# Altium PCB Luna_Board_PCB_D0.PcbDoc (part 1 of 2)
Units mm, origin at the board's own origin, x right, y up, seen from the top; angles counter-clockwise.
Board outline 53.97 x 25.4 mm, 4 copper layers (Top Layer, Layer 1, Layer 2, Bottom Layer), stack 1.587 mm thick; 65 components, 71 nets, 287 pads, 168 vias.
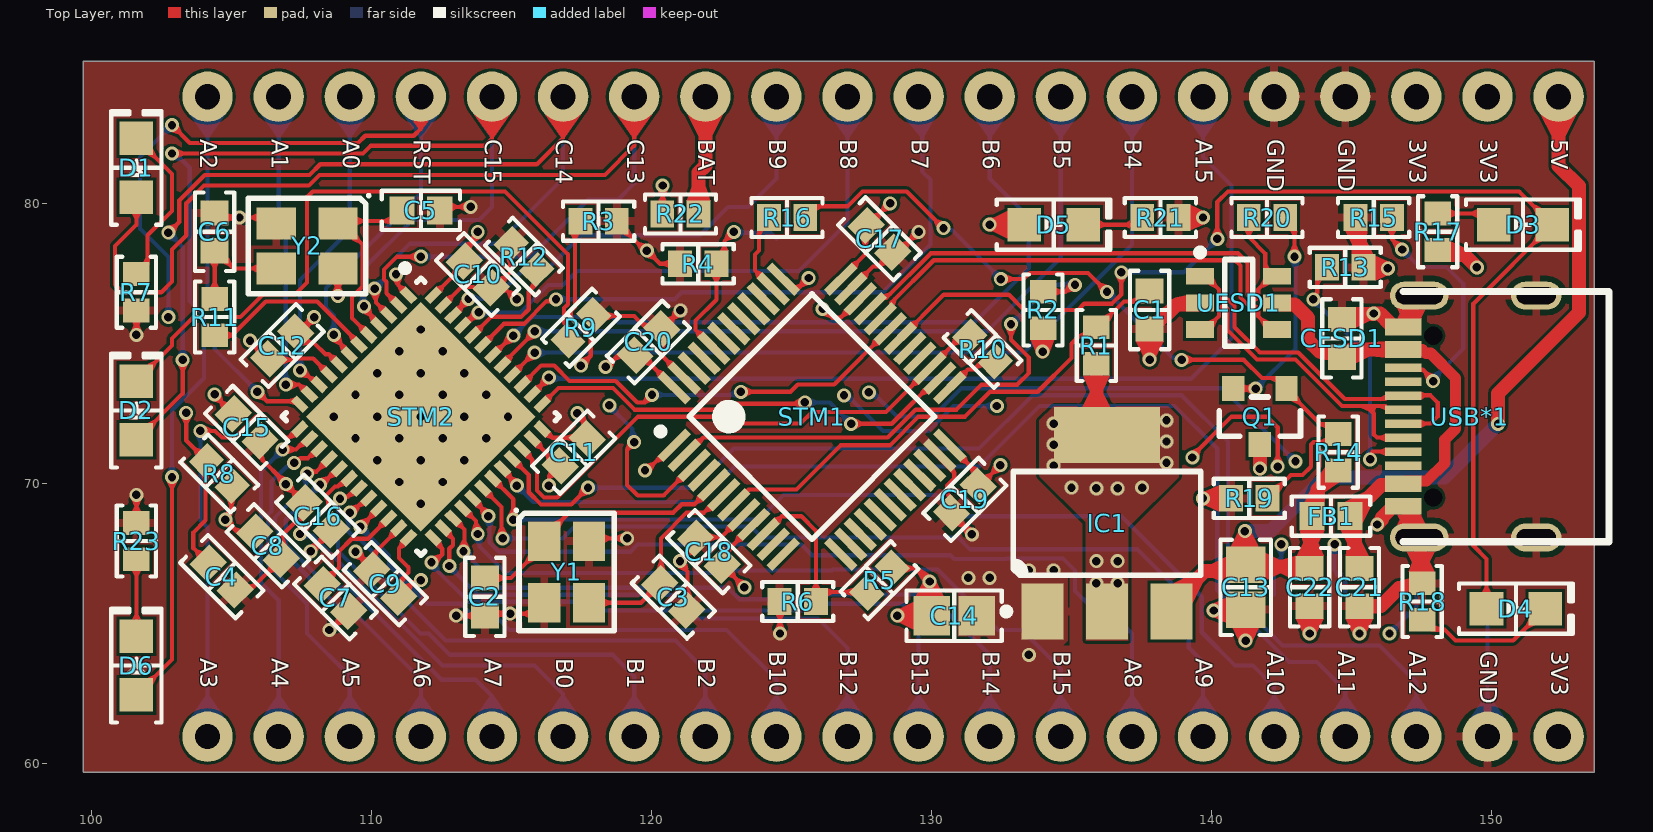
[diagram p0: Top Layer view]
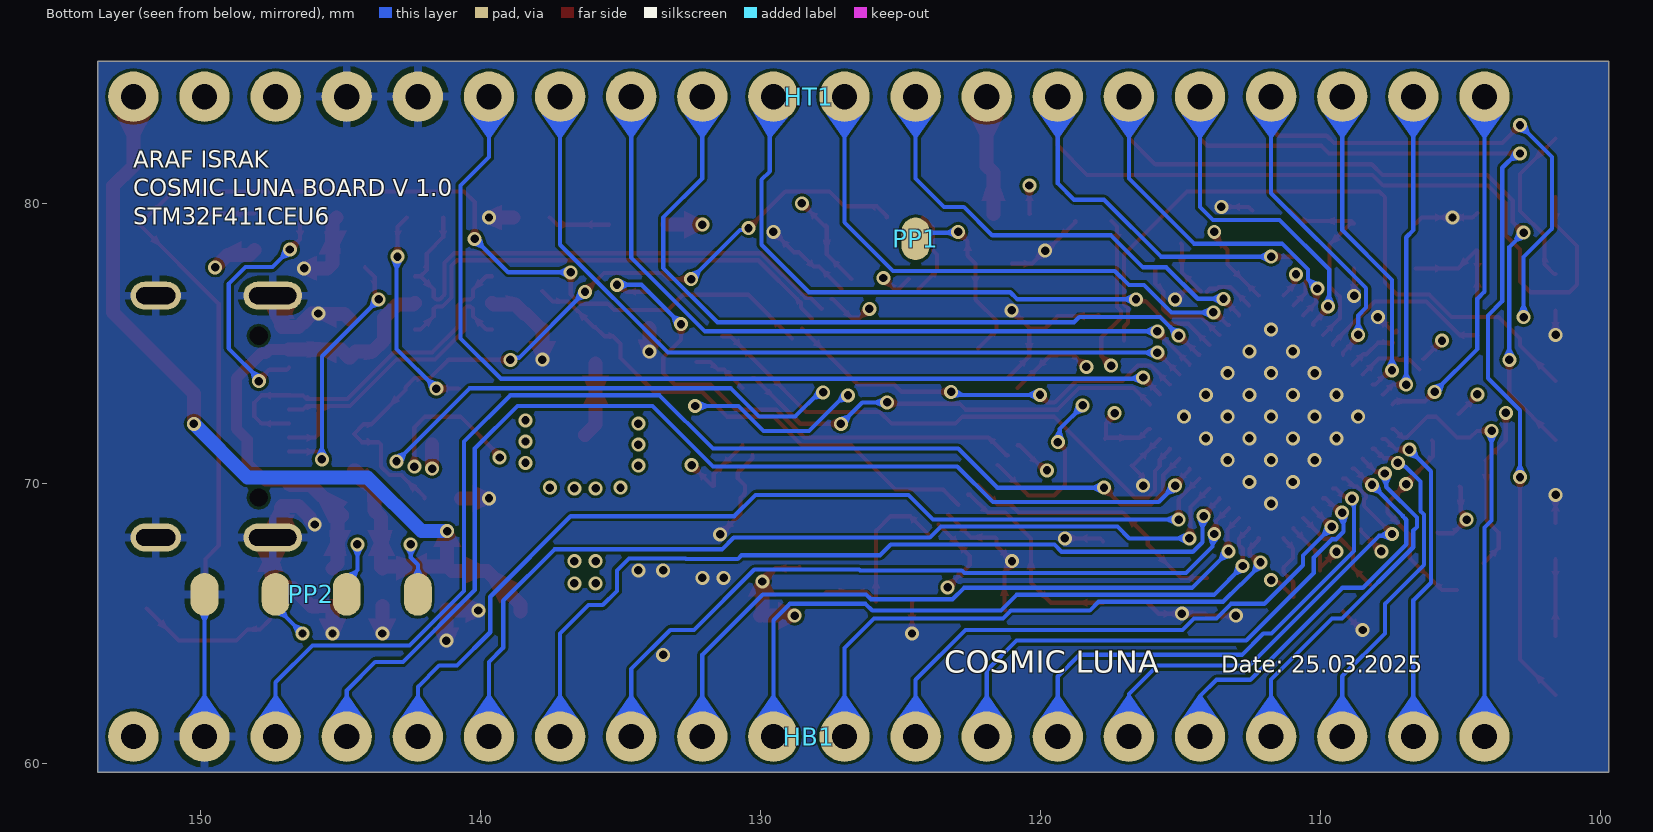
[diagram p1: Bottom Layer view, seen from below]
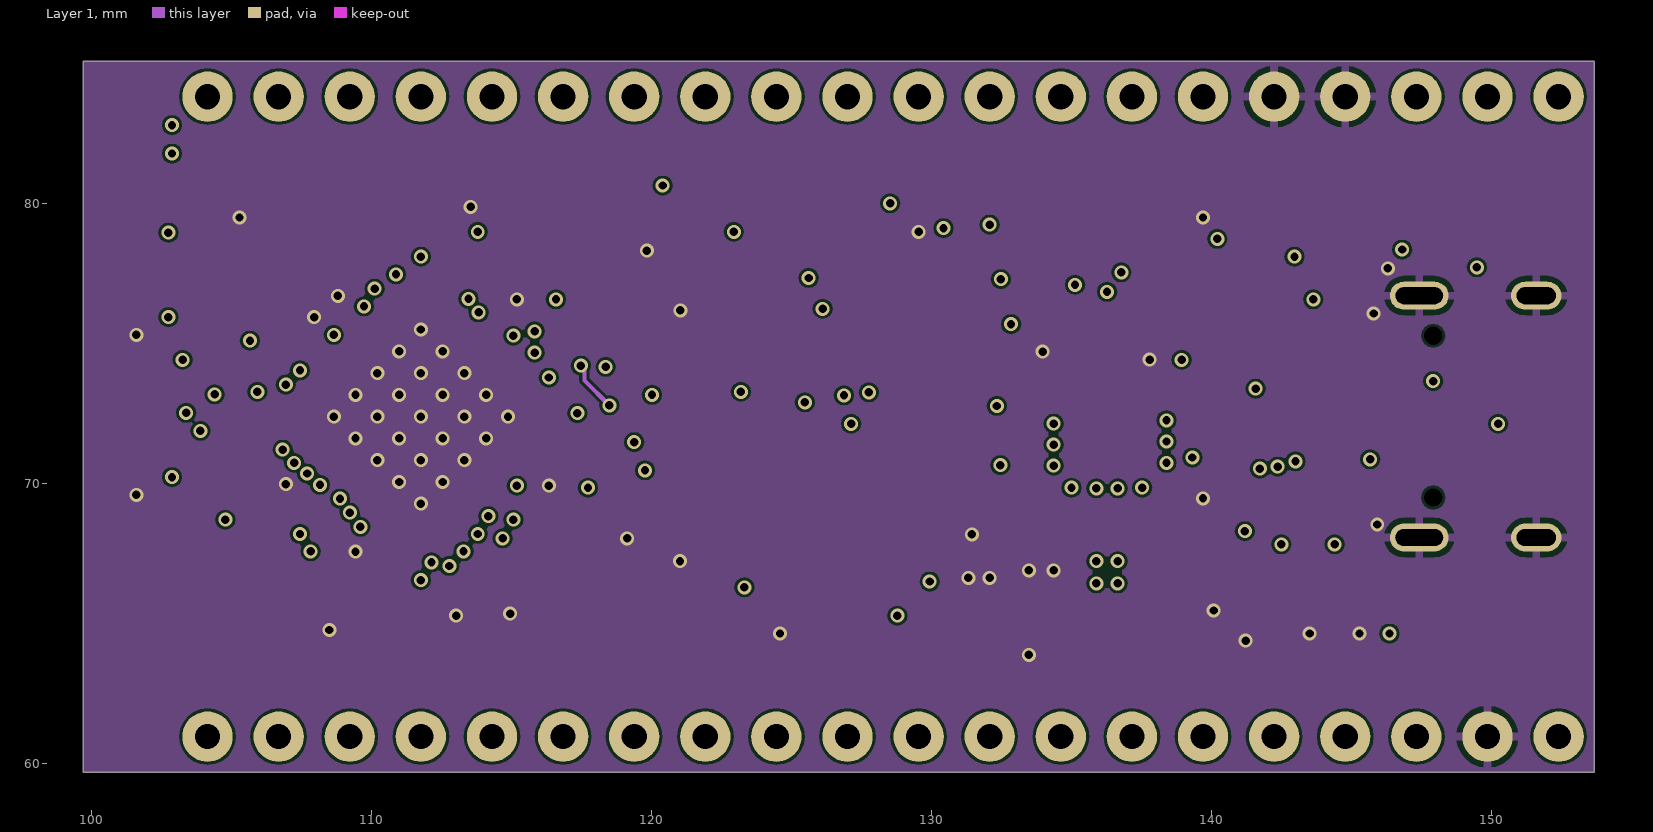
[diagram p2: Layer 1]
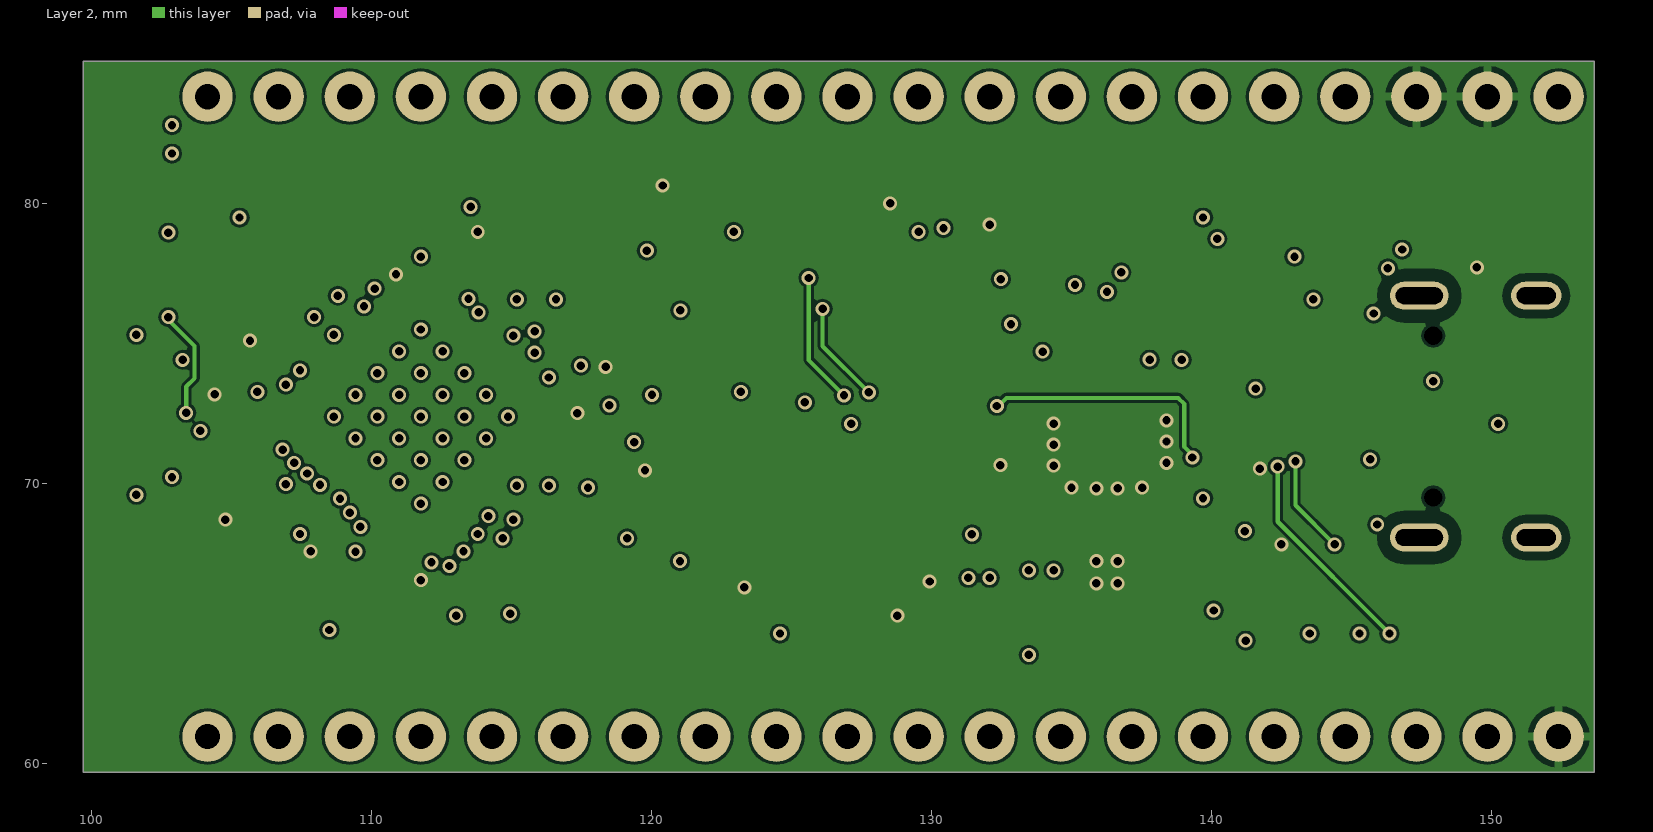
[diagram p3: Layer 2]
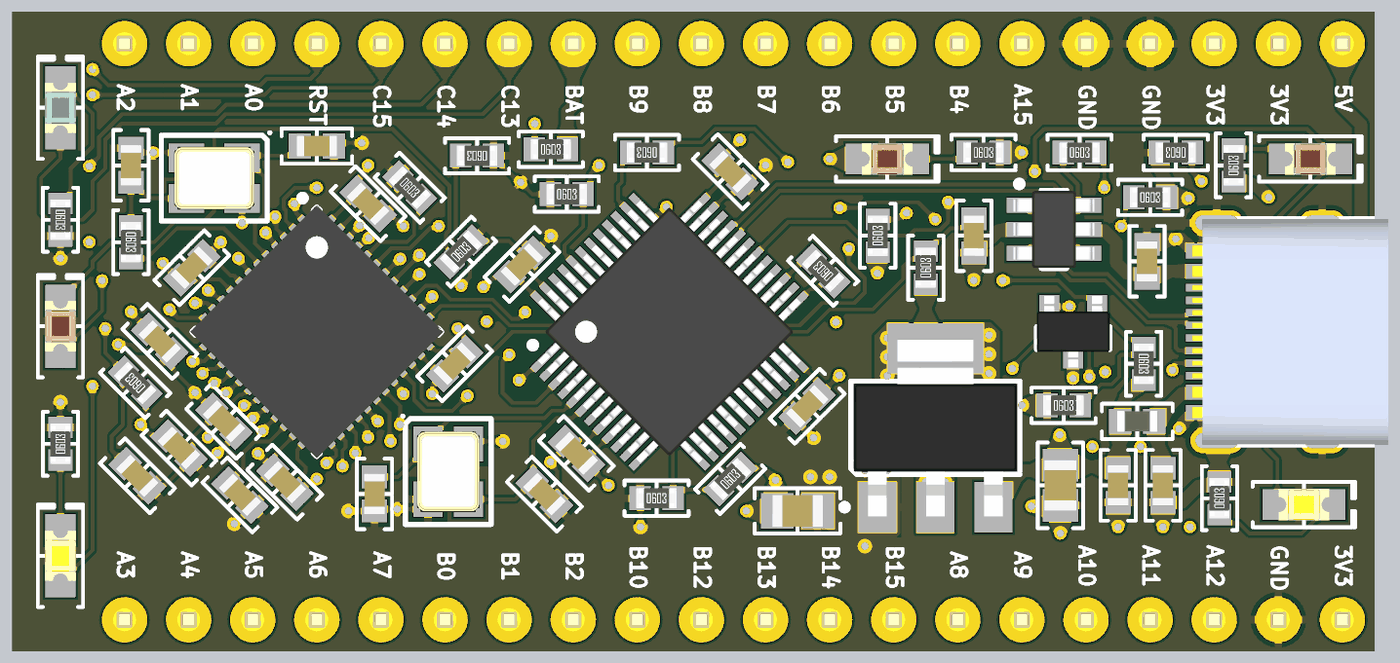
[diagram p5: 3D render of the assembled board from above, using the file's embedded part models]

## Layer stack, top to bottom
Top Solder: solder mask 0.0102, Solder Resist, Dk 3.5
Top Layer: signal copper 0.0356
Dielectric 2: prepreg 0.21, PP-006, Dk 4.1
Layer 1: signal copper 0.0153
Dielectric 1: dielectric 1.065, FR-4, Dk 4.8
Layer 2: signal copper 0.0153
Dielectric 3: prepreg 0.21, PP-006, Dk 4.1
Bottom Layer: signal copper 0.0356
Bottom Solder: solder mask 0.0102, Solder Resist, Dk 3.5

## Board outline
99.695,59.69 99.695,85.09 153.67,85.09 153.67,59.69

## Design rules (kind name [scope] priority, off if disabled: settings)
Clearance [All] p1: gap=0.1 ignorepadtopadclearanceinfootprint=TRUE
DiffPairsRouting [All] p1: maxlimit=0.254 minlimit=0.1 mostfreqgap=0.15 toplayer_minwidth=0.1 toplayer_maxwidth=0.381 toplayer_prefwidth=0.15 midlayer1_minwidth=0.1 midlayer1_maxwidth=0.381 midlayer1_prefwidth=0.15 midlayer2_minwidth=0.1 midlayer2_maxwidth=0.381 midlayer2_prefwidth=0.15 bottomlayer_minwidth=0.1 bottomlayer_maxwidth=0.381 bottomlayer_prefwidth=0.15 maxuncoupledlength=12.7
HoleSize [All] p1: absolutevalues=TRUE maxlimit=2.54 minlimit=0.15 maxpercent=80.000 minpercent=20.000
HoleToHoleClearance [All] p1: gap=0.2 allowstackedmicrovias=TRUE
MinimumSolderMaskSliver [All] p1: minsoldermaskwidth=0.01
PolygonConnect PolygonConnect_7 [All vs IsNamedPolygon('GND_L04_P012')] p1: thpad.connectstyle=Relief thpad.reliefconductorwidth=0.3 thpad.reliefentries=4 thpad.polygonreliefangle="90 Angle" thpad.airgapwidth=0.2 smdpad.connectstyle=Relief smdpad.reliefconductorwidth=0.3 smdpad.reliefentries=4 smdpad.polygonreliefangle="90 Angle" smdpad.airgapwidth=0.2 via.connectstyle=Direct via.reliefconductorwidth=0.254 via.reliefentries=4 via.polygonreliefangle="90 Angle" via.airgapwidth=0.254
PolygonConnect PolygonConnect_6 [All vs IsNamedPolygon('GND_L01_P010')] p2: thpad.connectstyle=Relief thpad.reliefconductorwidth=0.3 thpad.reliefentries=4 thpad.polygonreliefangle="90 Angle" thpad.airgapwidth=0.2 smdpad.connectstyle=Relief smdpad.reliefconductorwidth=0.3 smdpad.reliefentries=4 smdpad.polygonreliefangle="90 Angle" smdpad.airgapwidth=0.2 via.connectstyle=Direct via.reliefconductorwidth=0.254 via.reliefentries=4 via.polygonreliefangle="90 Angle" via.airgapwidth=0.254
PolygonConnect PolygonConnect_5 [All vs IsNamedPolygon('GND_L02_P000')] p3: thpad.connectstyle=Relief thpad.reliefconductorwidth=0.3 thpad.reliefentries=4 thpad.polygonreliefangle="90 Angle" thpad.airgapwidth=0.2 smdpad.connectstyle=Relief smdpad.reliefconductorwidth=0.3 smdpad.reliefentries=4 smdpad.polygonreliefangle="90 Angle" smdpad.airgapwidth=0.2 via.connectstyle=Direct via.reliefconductorwidth=0.254 via.reliefentries=4 via.polygonreliefangle="90 Angle" via.airgapwidth=0.254
PolygonConnect PolygonConnect_4 [All vs IsNamedPolygon('+3V3_L03_P002')] p4: thpad.connectstyle=Relief thpad.reliefconductorwidth=0.3 thpad.reliefentries=4 thpad.polygonreliefangle="90 Angle" thpad.airgapwidth=0.2 smdpad.connectstyle=Relief smdpad.reliefconductorwidth=0.3 smdpad.reliefentries=4 smdpad.polygonreliefangle="90 Angle" smdpad.airgapwidth=0.2 via.connectstyle=Direct via.reliefconductorwidth=0.254 via.reliefentries=4 via.polygonreliefangle="90 Angle" via.airgapwidth=0.254
PolygonConnect PolygonConnect_3 [All vs IsNamedPolygon('+3V3_L01_P008')] p5: connectstyle=Direct reliefconductorwidth=0.254 reliefentries=4 polygonreliefangle="90 Angle" airgapwidth=0.254
PolygonConnect PolygonConnect_2 [All vs IsNamedPolygon('GND_L01_P004')] p6: connectstyle=Direct reliefconductorwidth=0.254 reliefentries=4 polygonreliefangle="90 Angle" airgapwidth=0.254
PolygonConnect PolygonConnect_1 [All vs IsNamedPolygon('GND_L01_P004')] p7: thpad.connectstyle=Direct thpad.reliefconductorwidth=0.254 thpad.reliefentries=4 thpad.polygonreliefangle="90 Angle" thpad.airgapwidth=0.254 smdpad.connectstyle=Direct smdpad.reliefconductorwidth=0.254 smdpad.reliefentries=4 smdpad.polygonreliefangle="90 Angle" smdpad.airgapwidth=0.254 via.connectstyle=Relief via.reliefconductorwidth=0.254 via.reliefentries=4 via.polygonreliefangle="90 Angle" via.airgapwidth=0.254
PolygonConnect [All] p8: connectstyle=Relief reliefconductorwidth=0.3 reliefentries=4 polygonreliefangle="90 Angle" airgapwidth=0.2
RoutingVias [All] p1: holewidth=0.3 width=0.5 viastyle="Through Hole" minholewidth=0.3 minwidth=0.5 maxholewidth=0.3 maxwidth=0.5
SilkToSilkClearance [All] p1: silktosilkclearance=0
SilkToSolderMaskClearance [IsPad] p1: minsilkscreentomaskgap=0.01 clearancetoexposedcopper=TRUE
SolderMaskExpansion [All] p1: expansion=0.038
UnRoutedNet [All] p1: checkbadconnections=TRUE
Width [All] p1: maxlimit=0.5 minlimit=0.1 preferedwidth=0.15
23 further rules are at their usual default settings.

## Classes and differential pairs
differential pair USB: +USB_P -USB_N
differential pair DF: +DF_P -DF_N

## Components (designator, comment, footprint, x,y, rotation, side; value= is the part's Value field where it differs from the comment)
C1 "100nF" "CAP 0603_1608" 137.795,76.2 r90 top
C2 "12 pF" "CAP 0603_1608" 114.046,65.953 r90 top
C3 "12 pF" "CAP 0603_1608" 120.777,65.944 r135 top
C4 "100nF" "CAP 0603_1608" 104.648,66.675 r135 top
C5 "12 pF" "CAP 0603_1608" 111.76,79.756 r180 top
C6 "12 pF" "CAP 0603_1608" 104.394,78.994 r270 top
C7 "4.7µF" "CAP 0603_1608" 108.712,65.913 r315 top
C8 "10µF" "CAP 0603_1608" 106.299,67.778 r135 top
C9 "100nF" "CAP 0603_1608" 110.49,66.421 r315 top
C10 "100nF" "CAP 0603_1608" 113.792,77.47 r135 top
C11 "100nF" "CAP 0603_1608" 117.221,71.12 r45 top
C12 "100nF" "CAP 0603_1608" 106.807,74.93 r225 top
C13 "22µF" "CAP 0805_2012" 141.224,66.294 r90 top
C14 "22µF" "CAP 0805_2012" 130.81,65.278 r180 top
C15 "1 µF" "CAP 0603_1608" 105.537,72.009 r135 top
C16 "100nF" "CAP 0603_1608" 108.077,68.834 r315 top
C17 "100nF" "CAP 0603_1608" 128.143,78.74 r135 top
C18 "100nF" "CAP 0603_1608" 122.047,67.564 r315 top
C19 "100nF" "CAP 0603_1608" 131.191,69.436 r45 top
C20 "100nF" "CAP 0603_1608" 119.888,75.057 r225 top
C21 "2.2µF" "CAP 0603_1608" 145.288,66.294 r270 top
C22 "2.2µF" "CAP 0603_1608" 143.51,66.294 r270 top
CESD1 "100nF" "CAP 0603_1608" 144.659,75.184 r270 top
D1 "Green" "LED 0805_2012 GREEN" 101.6,81.28 r90 top
D2 "Red" "LED 0805_2012 RED" 101.6,72.61 r90 top
D3 "Red" "LED 0805_2012 RED" 151.13,79.248 r0 top
D4 "Yellow" "LED 0805_2012 YELLOW" 150.876,65.532 r0 top
D5 "Red" "LED 0805_2012 RED" 134.366,79.248 r0 top
D6 "Yellow" "LED 0805_2012 YELLOW" 101.6,63.5 r90 top
FB1 "Ferrite Bead" "FER 0603_1608" 144.272,68.834 r0 top value="600 Ohms @ 100MHz"
HB1 "2.54mm_TH_1x20_pin_header" 2.54mm_TH_1x20_pin_header 144.78,60.96 r180 bottom locked
HT1 "2.54mm_TH_1x20_pin_header" 2.54mm_TH_1x20_pin_header 144.78,83.82 r180 bottom locked
IC1 "AMS1117-3.3" "ST SOT-223" 136.271,68.58 r90 top
PP1 "pin_pad_1" pinpad_1 124.46,78.74 r180 bottom
PP2 "pin_pad_4" pinpad_4 142.24,66.04 r0 bottom locked
Q1 "500mA NPN BJT" "DIODES SOT-23-3" 141.732,72.39 r270 top
R1 "100k Ohms" "RES 0603_1608" 135.89,74.93 r90 top
R2 "10 kOhms" "RES 0603_1608" 133.985,76.2 r90 top
R3 "10 kOhms" "RES 0603_1608" 118.11,79.375 r180 top
R4 "100k Ohms" "RES 0603_1608" 121.666,77.851 r0 top
R5 "4.7k Ohms" "RES 0603_1608" 128.143,66.548 r45 top
R6 "4.7k Ohms" "RES 0603_1608" 125.222,65.786 r0 top
R7 "330 Ohms" "RES 0603_1608" 101.6,76.835 r270 top
R8 "10 kOhms" "RES 0603_1608" 104.561,70.358 r135 top
R9 "330 Ohms" "RES 0603_1608" 117.475,75.565 r45 top
R10 "100 Ohms" "RES 0603_1608" 131.826,74.803 r135 top
R11 "0 Ohms" "RES 0603_1608" 104.394,75.946 r270 top
R12 "10 kOhms" "RES 0603_1608" 115.443,78.105 r315 top
R13 "5.1k Ohms" "RES 0603_1608" 144.78,77.724 r0 top
R14 "10 kOhms" "RES 0603_1608" 144.526,71.12 r270 top
R15 "5.1k Ohms" "RES 0603_1608" 145.796,79.502 r180 top
R16 "100 Ohms" "RES 0603_1608" 124.841,79.502 r180 top
R17 "330 Ohms" "RES 0603_1608" 148.082,78.994 r90 top
R18 "330 Ohms" "RES 0603_1608" 147.529,65.786 r90 top
R19 "33k Ohms" "RES 0603_1608" 141.351,69.469 r0 top
R20 "1.5k Ohms" "RES 0603_1608" 141.986,79.502 r0 top
R21 "330 Ohms" "RES 0603_1608" 138.176,79.502 r0 top
R22 "0 Ohms" "RES 0603_1608" 121.031,79.629 r0 top
R23 "330 Ohms" "RES 0603_1608" 101.6,67.945 r90 top
STM1 "STM32F103CBT6" STM32F103CBT6_FOOTPRINT 125.73,72.39 r45 top locked
STM2 "STM32F411CEU6" STM32F411CEU6_Footprint 111.76,78.047 r315 top locked
UESD1 "USBLC6-2SC6" USBLC6-2SC6_Footprint 140.97,76.454 r0 top
USB*1 "USB-TYPE-C 16P" "USB TYPE-C 24P SMD" 149.225,72.39 r90 top locked
Y1 "8 MHz" "EPSON TSX-3225" 116.967,66.842 r270 top
Y2 "8 MHz" "EPSON TSX-3225" 107.696,78.486 r180 top

## Footprints (in the part's own frame and the unit in brackets; to place one, negate y for a bottom-side part, rotate by r counter-clockwise, add the part's x,y. Pads: shape width x height; smd on the part's side, far side on the other; paste and mask are expansions set on the pad)
2.54mm_TH_1x20_pin_header [mm]
  round 1.8 hole 0.9: 1(-7.62,0) 2(-5.08,0) 3(-2.54,0) 4(0,0) 5(2.54,0) 6(5.08,0) 7(7.62,0) 8(10.16,0) 9(12.7,0) 10(15.24,0) 11(17.78,0) 12(20.32,0) 13(22.86,0) 14(25.4,0) 15(27.94,0) 16(30.48,0) 17(33.02,0) 18(35.56,0) 19(38.1,0) 20(40.64,0)
  body extent -8.89,-1.25 41.91,1.25, height 8.6
"CAP 0603_1608" [mm] "Chip Capacitor, 2-Leads, Body 1.60x0.80mm, IPC Medium Density"
  rect 0.9x1 smd: 1(-0.675,0) 2(0.675,0)
  silkscreen extent -1.4,-0.7 1.4,0.7, body extent -0.8,-0.41 0.8,0.41, height 0.82
"CAP 0805_2012" [mm] "Chip Capacitor, 2-Leads, Body 2.00x1.20mm, IPC Medium Density"
  rect 1.3x1.4 smd: 1(-0.8,0) 2(0.8,0)
  silkscreen extent -1.7,-0.9 1.7,0.9, body extent -1,-0.64 1,0.64, height 1.26
"DIODES SOT-23-3" [mm] "SOT23, 3-Leads, Body 2.90x2.40mm, Pitch 0.95mm, IPC Medium Density"
  rect 0.9x0.8 smd: 1(-1,0.95) 2(-1,-0.95) 3(1,0)
  silkscreen extent -0.7,-1.45 0.7,1.45, body extent -1.41,-1.45 1.41,1.45, height 1.5
"EPSON TSX-3225" [mm] "Crystal, 4-Leads, Body 2.50x3.20mm, Pitch 2.20mm, IPC Medium Density"
  rect 1.4x1.15 smd: 1(-1.1,-0.8) 2(1.1,-0.8) 3(1.1,0.8) 4(-1.1,0.8)
  silkscreen extent -2.25,-1.85 2.1,1.7, body extent -1.61,-1.26 1.61,1.26, height 0.6
"FER 0603_1608" [mm] "Chip Ferrite, 2-Leads, Body 1.60x0.80mm, IPC Medium Density"
  rect 0.9x1 smd: 1(-0.675,0) 2(0.675,0)
  silkscreen extent -1.4,-0.7 1.4,0.7, body extent -0.8,-0.41 0.8,0.41, height 0.82
"LED 0805_2012 GREEN" [mm] "Chip Diode, 2-Leads, Body 2.00x1.25mm, IPC Medium Density"
  rect 1.2x1.2 smd: 1(-1.05,0) 2(1.05,0)
  silkscreen extent -2.03,-0.9 2.03,0.9, body extent -1,-0.62 1,0.63, height 0.9
"LED 0805_2012 RED" [mm] "Chip Diode, 2-Leads, Body 2.00x1.25mm, IPC Medium Density"
  rect 1.2x1.2 smd: 1(-1.05,0) 2(1.05,0)
  silkscreen extent -2.03,-0.9 2.03,0.9, body extent -1,-0.62 1,0.63, height 0.9
"LED 0805_2012 YELLOW" [mm] "Chip Diode, 2-Leads, Body 2.00x1.25mm, IPC Medium Density"
  rect 1.2x1.2 smd: 1(-1.05,0) 2(1.05,0)
  silkscreen extent -2.03,-0.9 2.03,0.9, body extent -1,-0.62 1,0.63, height 0.9
pinpad_1 [mm]
  oval 1x1.524 smd: 1(0,0)
pinpad_4 [mm]
  oval 1x1.524 smd: 1(0,0) 2(2.54,0) 3(5.08,0) 4(7.62,0)
"RES 0603_1608" [mm] "Chip Resistor, 2-Leads, Body 1.60x0.80mm, IPC Medium Density"
  rect 0.85x0.95 smd: 1(-0.65,0) 2(0.65,0)
  silkscreen extent -1.27,-0.7 1.27,0.7, body extent -0.8,-0.4 0.8,0.4, height 0.45
"ST SOT-223" [mm] "SOT223, 4-Leads, Body 6.50x7.00mm (avg), Pitch 2.30mm, IPC Medium Density"
  rect 2x1.5 smd: 1(-3.15,2.3) 2(-3.15,0) 3(-3.15,-2.3)
  rect 2x3.8 smd: 4(3.15,0)
  silkscreen extent -3.27,-3.35 1.85,3.72, body extent -3.52,-3.25 3.5,3.25, height 1.8
STM32F103CBT6_FOOTPRINT [mm] "TSQFP, 48-Leads, Body 7.00x7.00mm, Pitch 0.50mm, IPC Medium Density"
  rect 1.4x0.3 smd mask+0.04: 1(-4.2,2.75) 2(-4.2,2.25) 3(-4.2,1.75) 4(-4.2,1.25) 5(-4.2,0.75) 6(-4.2,0.25) 7(-4.2,-0.25) 8(-4.2,-0.75) 9(-4.2,-1.25) 10(-4.2,-1.75) 11(-4.2,-2.25) 12(-4.2,-2.75) 25(4.2,-2.75) 26(4.2,-2.25) 27(4.2,-1.75) 28(4.2,-1.25) 29(4.2,-0.75) 30(4.2,-0.25) 31(4.2,0.25) 32(4.2,0.75) 33(4.2,1.25) 34(4.2,1.75) 35(4.2,2.25) 36(4.2,2.75)
  rect 0.3x1.4 smd mask+0.04: 13(-2.75,-4.2) 14(-2.25,-4.2) 15(-1.75,-4.2) 16(-1.25,-4.2) 17(-0.75,-4.2) 18(-0.25,-4.2) 19(0.25,-4.2) 20(0.75,-4.2) 21(1.25,-4.2) 22(1.75,-4.2) 23(2.25,-4.2) 24(2.75,-4.2) 37(2.75,4.2) 38(2.25,4.2) 39(1.75,4.2) 40(1.25,4.2) 41(0.75,4.2) 42(0.25,4.2) 43(-0.25,4.2) 44(-0.75,4.2) 45(-1.25,4.2) 46(-1.75,4.2) 47(-2.25,4.2) 48(-2.75,4.2)
  silkscreen extent -4.32,-3.1 3.1,3.57, body extent -4.5,-4.5 4.5,4.5, height 1.6
STM32F411CEU6_Footprint [mm]
  rect 0.6x0.3 smd mask+0.04: 1(0.625,-1.25) 2(0.625,-1.75) 3(0.625,-2.25) 4(0.625,-2.75) 5(0.625,-3.25) 6(0.625,-3.75) 7(0.625,-4.25) 8(0.625,-4.75) 9(0.625,-5.25) 10(0.625,-5.75) 11(0.625,-6.25) 12(0.625,-6.75) 25(7.375,-6.75) 26(7.375,-6.25) 27(7.375,-5.75) 28(7.375,-5.25) 29(7.375,-4.75) 30(7.375,-4.25) 31(7.375,-3.75) 32(7.375,-3.25) 33(7.375,-2.75) 34(7.375,-2.25) 35(7.375,-1.75) 36(7.375,-1.25)
  rect 0.3x0.6 smd mask+0.04: 13(1.25,-7.375) 14(1.75,-7.375) 15(2.25,-7.375) 16(2.75,-7.375) 17(3.25,-7.375) 18(3.75,-7.375) 19(4.25,-7.375) 20(4.75,-7.375) 21(5.25,-7.375) 22(5.75,-7.375) 23(6.25,-7.375) 24(6.75,-7.375) 37(6.75,-0.625) 38(6.25,-0.625) 39(5.75,-0.625) 40(5.25,-0.625) 41(4.75,-0.625) 42(4.25,-0.625) 43(3.75,-0.625) 44(3.25,-0.625) 45(2.75,-0.625) 46(2.25,-0.625) 47(1.75,-0.625) 48(1.25,-0.625)
  rect 5.8x5.8 smd mask+0.04: 47(4,-4)
  silkscreen extent -0.27,-7.5 7.5,-0.5, body extent 0.45,-7.55 7.55,-0.45, height 0.6
"USB TYPE-C 24P SMD" [mm]
  rect 0.6x1.3 smd mask+0.038: 1(-3.2,2.378) 2(-2.4,2.378) 11(2.4,2.378) 12(3.2,2.378)
  rect 0.3x1.3 smd mask+0.038: 3(-1.75,2.378) 4(-1.25,2.378) 5(-0.75,2.378) 6(-0.25,2.378) 7(0.25,2.378) 8(0.75,2.378) 9(1.25,2.378) 10(1.75,2.378)
  rrect100% 1x1.8 hole 1.4 slot 0.6 at 0 deg: 13(-4.32,-2.377) 13(4.32,-2.377)
  rrect100% 1x2.1 hole 1.7 slot 0.6 at 0 deg: 13(-4.32,1.803) 13(4.32,1.803)
  round 0 hole 0.65 unplated: ""(-2.89,1.303) ""(2.89,1.303)
  Top Layer pour cut-out: -2.289,2.378
  silkscreen extent -4.47,-4.97 4.47,2.38, body extent -4.47,-4.98 4.47,2.77, height 3.16
USBLC6-2SC6_Footprint [mm] "SOT23, 6-Leads, Body 2.93x2.80mm, Pitch 0.95mm, IPC Medium Density"
  rect 1x0.6 smd: 1(-1.375,0.95) 2(-1.375,0) 3(-1.375,-0.95) 4(1.375,-0.95) 5(1.375,0) 6(1.375,0.95)
  silkscreen extent -1.5,-1.55 0.5,1.92, body extent -1.6,-1.53 1.6,1.53, height 1.45

## Part data
C1 C4 C9 C10 C11 C12 C16 C17 C18 C19 C20 C21 C22 CESD1: library part 06031C104KAT2A, "CAP CER 0.1UF 100V X7R 0603", Device Package="0603 (1608 Metric)", Manufacturer="AVX Corporation", Operating Temperature="-55°C ~ 125°C", Supplier Part Number 1=478-10047-1-ND, Temperature Coefficient=X7R, Tolerance=±10%, Voltage - Rated=100V, Applications="General Purpose", ComponentLink1Description=Datasheet, ComponentLink1URL=http://datasheets.avx.com/X7RDielectric.pdf, ComponentLink2Description="DigiKey Link", ComponentLink2URL=http://digikey.com/product-detail/en/avx-corporation/06031C104KAT2A/478-10047-1-ND/6564270, LastUpdated="9/2/2020 1:03:14 AM", Lifecycle Status=Active, Minimum Order=1, Mounting Type="Surface Mount, MLCC", Package / Case="0603 (1608 Metric)", Packaging=TapeAndReel, PartId=14077, Part Number=06031C104KAT2A, Part Status=Active, Price=0.03, Series=-, Size / Dimension="0.063\" L x 0.032\" W (1.60mm x 0.81mm)", Supplier 1=DigiKey, Thickness (Max)="0.037\" (0.94mm)"
  C1 C4 C9 C10 C11 C12 C16 C17 C18 C19 C20 CESD1: Capacitance=100nF
  C21 C22: Capacitance=2.2µF
C2 C3 C5 C6: library part C06CF220F-9ZN-X0T, "HIGH-Q MLCC (CF): 0603, 22 PF (1", Device Package="0603 (1608 Metric)", Manufacturer="Knowles Dielectric Labs", Operating Temperature="-55°C ~ 125°C", Supplier Part Number 1=1761-C06CF220F-9ZN-X0TCT-ND, Temperature Coefficient="C0G, NP0", Tolerance=±1%, Voltage - Rated=250V, Applications="RF, Microwave, High Frequency", Capacitance="12 pF", ComponentLink1Description=Datasheet, ComponentLink1URL=https://media.digikey.com/pdf/Data%20Sheets/Knowles%20Dielectric%20Labs%20PDFs/MLC_SLC_Cap_Cat.pdf, ComponentLink2Description="DigiKey Link", ComponentLink2URL=https://www.digikey.com/en/products/detail/knowles-dielectric-labs/C06CF220F-9ZN-X0T/19203937, Features="High Q, Low Loss", LastUpdated="2/9/2024 8:08:55 PM", Lifecycle Status=Active, Minimum Order=1, Mounting Type="Surface Mount, MLCC", Package / Case="0603 (1608 Metric)", Packaging=TapeAndReel, PartId=55085, Part Number=C06CF220F-9ZN-X0T, Part Status=Active, Price=2.56, Series=CF, Size / Dimension="0.060\" L x 0.030\" W (1.52mm x 0.76mm)", Supplier 1=DigiKey, Thickness (Max)="0.031\" (0.80mm)"
C7: library part 0603ZG475ZAT2A, "CAP CER 4.7UF 10V Y5V 0603", Device Package="0603 (1608 Metric)", Manufacturer="AVX Corporation", Operating Temperature="-30°C ~ 85°C", Supplier Part Number 1=478-12465-1-ND, Temperature Coefficient="Y5V (F)", Tolerance="-20%, +80%", Voltage - Rated=10V, Applications="General Purpose", Capacitance=4.7µF, ComponentLink1Description=Datasheet, ComponentLink1URL=http://datasheets.avx.com/Y5V.pdf, ComponentLink2Description="DigiKey Link", ComponentLink2URL=http://digikey.com/product-detail/en/avx-corporation/0603ZG475ZAT2A/478-12465-1-ND/9749317, LastUpdated="9/2/2020 1:03:34 AM", Lifecycle Status=Active, Minimum Order=1, Mounting Type="Surface Mount, MLCC", Package / Case="0603 (1608 Metric)", Packaging=TapeAndReel, PartId=2943, Part Number=0603ZG475ZAT2A, Part Status=Active, Price=0.19, Series=-, Size / Dimension="0.063\" L x 0.032\" W (1.60mm x 0.81mm)", Supplier 1=DigiKey
C8: library part 0603ZD106KAT2A, "CAP CER 10UF 10V X5R 0603", Device Package="0603 (1608 Metric)", Manufacturer="AVX Corporation", Operating Temperature="-55°C ~ 85°C", Supplier Part Number 1=478-10766-1-ND, Temperature Coefficient=X5R, Tolerance=±10%, Voltage - Rated=10V, Applications="General Purpose", Capacitance=10µF, ComponentLink1Description=Datasheet, ComponentLink1URL=http://datasheets.avx.com/cx5r.pdf, ComponentLink2Description="DigiKey Link", ComponentLink2URL=http://digikey.com/product-detail/en/avx-corporation/0603ZD106KAT2A/478-10766-1-ND/7536554, LastUpdated="9/2/2020 1:03:35 AM", Lifecycle Status=Active, Minimum Order=1, Mounting Type="Surface Mount, MLCC", Package / Case="0603 (1608 Metric)", Packaging=TapeAndReel, PartId=2590, Part Number=0603ZD106KAT2A, Part Status=Active, Price=0.08, Series=-, Size / Dimension="0.063\" L x 0.032\" W (1.60mm x 0.81mm)", Supplier 1=DigiKey, Thickness (Max)="0.037\" (0.94mm)"
C13 C14: library part 0805ZD226MAT2A, "CAP CER 22UF 10V X5R 0805", Device Package="0805 (2012 Metric)", Manufacturer="AVX Corporation", Operating Temperature="-55°C ~ 85°C", Supplier Part Number 1=478-7966-1-ND, Temperature Coefficient=X5R, Tolerance=±20%, Voltage - Rated=10V, Applications="General Purpose", Capacitance=22µF, ComponentLink1Description=Datasheet, ComponentLink1URL=http://datasheets.avx.com/cx5r.pdf, ComponentLink2Description="DigiKey Link", ComponentLink2URL=http://digikey.com/product-detail/en/avx-corporation/0805ZD226MAT2A/478-7966-1-ND/3881589, LastUpdated="9/2/2020 1:04:32 AM", Lifecycle Status=Active, Minimum Order=1, Mounting Type="Surface Mount, MLCC", Package / Case="0805 (2012 Metric)", Packaging=TapeAndReel, PartId=7750, Part Number=0805ZD226MAT2A, Part Status=Active, Price=0.10, Series=-, Size / Dimension="0.079\" L x 0.049\" W (2.00mm x 1.25mm)", Supplier 1=DigiKey, Thickness (Max)="0.060\" (1.52mm)"
C15: library part NMC0603X7R105K16TRPF, "CAP SMT06031F16VDC", Device Package="0603 (1608 Metric)", Manufacturer="NIC Components Corp", Operating Temperature="-55°C ~ 125°C", Supplier Part Number 1=4988-NMC0603X7R105K16TRPFCT-ND, Temperature Coefficient=X7R, Tolerance=±10%, Voltage - Rated=16V, Applications="General Purpose", Capacitance="1 µF", ComponentLink1Description=Datasheet, ComponentLink1URL=https://www.niccomp.com/quickbuilder/qbpn.php?pNumber=NMC0603X7R105K16TRPF, ComponentLink2Description="DigiKey Link", ComponentLink2URL=https://www.digikey.com/en/products/detail/nic-components-corp/NMC0603X7R105K16TRPF/18895971, Features="Low ESL, Low ESR", LastUpdated="2/9/2024 8:08:45 PM", Lifecycle Status=Active, Minimum Order=1, Mounting Type="Surface Mount, MLCC", Package / Case="0603 (1608 Metric)", Packaging=TapeAndReel, PartId=55958, Part Number=NMC0603X7R105K16TRPF, Price=0.02, Series="NMC High CV", Size / Dimension="0.063\" L x 0.031\" W (1.60mm x 0.80mm)", Supplier 1=DigiKey, Thickness (Max)="0.039\" (1.00mm)"
D1: library part QBLP631-YG1-2943, "0805 LED RED 570NM DOMINANT, 565", Current - Test=20mA, Device Package="0805 (2012 Metric)", Lens Color=White, Manufacturer="QT Brightek (QTB)", Millicandela Rating=15mcd, Supplier Device Package=0805, Supplier Part Number 1=1516-QBLP631-YG1-2943CT-ND, Voltage - Forward (Vf) (Typ)=2V, Color=Green, ComponentLink1Description=Datasheet, ComponentLink1URL=https://www.qt-brightek.com/datasheet/QBLP631-YG1-2943.pdf, ComponentLink2Description="DigiKey Link", ComponentLink2URL=https://www.digikey.com/en/products/detail/qt-brightek-qtb/QBLP631-YG1-2943/22106671, Configuration=Standard, Height (Max)=0.90mm, LastUpdated="6/3/2024 8:00:23 PM", Lens Size="1.30mm x 1.25mm", Lens Style="Rectangle with Flat Top", Lens Transparency=Diffused, Lifecycle Status=Active, Minimum Order=1, Mounting Type="Surface Mount", Package / Case="0805 (2012 Metric)", Packaging=TapeAndReel, PartId=1479, Part Number=QBLP631-YG1-2943, Price=0.05, Series=QBLP631, Size / Dimension="2.00mm L x 1.25mm W", Supplier 1=DigiKey, Viewing Angle=140°, Wavelength - Dominant=570nm, Wavelength - Peak=565nm
D2 D3 D5: library part QBLP631-S3, "0805 LED RED 640NM DOMINANT, 660", Current - Test=20mA, Device Package="0805 (2012 Metric)", Lens Color=Colorless, Manufacturer="QT Brightek (QTB)", Millicandela Rating=25mcd, Supplier Device Package=0805, Supplier Part Number 1=1516-QBLP631-S3CT-ND, Voltage - Forward (Vf) (Typ)=1.9V, Color=Red, ComponentLink1Description=Datasheet, ComponentLink1URL=https://www.qt-brightek.com/datasheet/QBLP631-S3.pdf, ComponentLink2Description="DigiKey Link", ComponentLink2URL=https://www.digikey.com/en/products/detail/qt-brightek-qtb/QBLP631-S3/22106636, Configuration=Standard, Height (Max)=0.90mm, LastUpdated="6/3/2024 8:00:00 PM", Lens Size="1.30mm x 1.25mm", Lens Style="Rectangle with Flat Top", Lens Transparency=Clear, Lifecycle Status=Active, Minimum Order=1, Mounting Type="Surface Mount", Package / Case="0805 (2012 Metric)", Packaging=TapeAndReel, PartId=1474, Part Number=QBLP631-S3, Price=0.08, Series=QBLP631, Size / Dimension="2.00mm L x 1.25mm W", Supplier 1=DigiKey, Viewing Angle=140°, Wavelength - Dominant=640nm, Wavelength - Peak=660nm
D4 D6: library part 597-3222-407NF, "LED YELLOW DIFFUSED 0805 SMD", Current - Test=20mA, Device Package="0805 (2012 Metric)", Lens Color=White, Manufacturer=Dialight, Millicandela Rating=91mcd, Supplier Device Package=0805, Supplier Part Number 1=350-597-3222-407NFCT-ND, Voltage - Forward (Vf) (Typ)=2.15V, Color=Yellow, ComponentLink1Description=Datasheet, ComponentLink1URL=https://s3-us-west-2.amazonaws.com/catsy.557/C18700.pdf, ComponentLink2Description="DigiKey Link", ComponentLink2URL=https://www.digikey.com/en/products/detail/dialight/597-3222-407NF/21710484, Height (Max)=0.93mm, LastUpdated="6/3/2024 8:01:22 PM", Lens Size="1.30mm x 1.25mm", Lens Style="Rectangle with Flat Top", Lens Transparency=Diffused, Lifecycle Status=Active, Minimum Order=1, Mounting Type="Surface Mount", Package / Case="0805 (2012 Metric)", Packaging=TapeAndReel, PartId=1496, Part Number=597-3222-407NF, Price=0.08, Series=597, Size / Dimension="2.00mm L x 1.25mm W", Supplier 1=DigiKey, Viewing Angle=140°, Wavelength - Dominant=590nm
FB1: library part BLM18DN601SZ1D, "FERRITEBEAD SMD Z100MHZ=600OHM 7", Current Rating (Max)=700mA, Device Package="0603 (1608 Metric)", Impedance @ Frequency="600 Ohms @ 100MHz", Manufacturer="Murata Electronics", Operating Temperature="-55°C ~ 125°C", Ratings=AEC-Q200, Supplier Part Number 1=490-18575-1-ND, ComponentLink1Description=Datasheet, ComponentLink1URL=https://www.murata.com/en-us/api/pdfdownloadapi?cate=luNoiseSupprFilteChipFerriBead&partno=BLM18DN601SZ1%23, ComponentLink2Description="DigiKey Link", ComponentLink2URL=http://digikey.com/product-detail/en/murata-electronics/BLM18DN601SZ1D/490-18575-1-ND/10135586, Height (Max)="0.037\" (0.95mm)", LastUpdated="9/2/2020 1:18:18 AM", Lifecycle Status=Active, Minimum Order=1, Mounting Type="Surface Mount", Number of Lines=1, Package / Case="0603 (1608 Metric)", Packaging=TapeAndReel, PartId=783, Part Number=BLM18DN601SZ1D, Part Status=Active, Price=0.05, Series="EMIFIL®, BLM18", Size / Dimension="0.063\" L x 0.031\" W (1.60mm x 0.80mm)", Supplier 1=DigiKey
IC1: library part LDL1117S33R, "IC REG LINEAR 3.3V 1.2A SOT223", Current - Output=1.2A, Current - Quiescent (Iq)="500 µA", Manufacturer=STMicroelectronics, Operating Temperature="-40°C ~ 125°C (TJ)", Package / Case="TO-261-4, TO-261AA", Supplier Device Package=SOT-223, Supplier Part Number 1=497-17239-1-ND, Voltage - Input (Max)=18V, Voltage - Output (Min/Fixed)=3.3V, Voltage Dropout (Max)="0.6V @ 1.2A", ComponentLink1Description=Datasheet, ComponentLink1URL=http://www.st.com/content/ccc/resource/technical/document/datasheet/group3/0e/5a/00/ca/10/1a/4f/a5/DM00366442/files/DM00366442.pdf/jcr:content/translations/en.DM00366442.pdf, ComponentLink2Description="DigiKey Link", ComponentLink2URL=https://www.digikey.com/en/products/detail/stmicroelectronics/LDL1117S33R/7102071, LastUpdated="6/3/2024 8:25:59 PM", Lifecycle Status=Active, Minimum Order=1, Mounting Type="Surface Mount", Number of Regulators=1, Output Configuration=Positive, Output Type=Fixed, Packaging=TapeAndReel, Part Number=LDL1117S33R, Part Status=Active, Price=0.31, Protection Features="Over Current, Over Temperature, Under Voltage Lockout (UVLO)", PSRR="87dB ~ 65dB (120Hz ~ 100kHz)", Series=-, Supplier 1=DigiKey
Q1: library part DNLS160-7, "TRANS NPN 60V 1A SOT23-3", Current - Collector (Ic) (Max)=1A, Current - Collector Cutoff (Max)=100nA, DC Current Gain (hFE) (Min) @ Ic, Vce="200 @ 500mA, 5V", Frequency - Transition=270MHz, Manufacturer="Diodes Incorporated", Operating Temperature="-55°C ~ 150°C (TJ)", Package / Case="TO-236-3, SC-59, SOT-23-3", Power - Max=300mW, Supplier Device Package=SOT-23-3, Supplier Part Number 1=DNLS160DICT-ND, Voltage - Collector Emitter Breakdown (Max)=60V, ComponentLink1Description=Datasheet, ComponentLink1URL=https://www.diodes.com/assets/Datasheets/ds31390.pdf, ComponentLink2Description="DigiKey Link", ComponentLink2URL=http://digikey.com/product-detail/en/diodes-incorporated/DNLS160-7/DNLS160DICT-ND/1964776, LastUpdated="6/3/2024 8:24:10 PM", Lifecycle Status=Active, Minimum Order=1, Mounting Type="Surface Mount", Packaging=CutTape, PartId=44, Part Number=DNLS160-7, Part Status=Active, Price=0.45, Series=-, Supplier 1=DigiKey, Transistor Type=NPN, Vce Saturation (Max) @ Ib, Ic="250mV @ 100mA, 1A"
R1 R4: library part RNCS0603BKE10K0, "RES 100K OHM 0.1% 1/16W 0603", Device Package="0603 (1608 Metric)", Manufacturer="Stackpole Electronics Inc", Operating Temperature="-55°C ~ 155°C", Power (Watts)="0.063W, 1/16W", Ratings=AEC-Q200, Resistance="100 kOhms", Supplier Device Package=0603, Supplier Part Number 1=RNCS0603BKE10K0CT-ND, Temperature Coefficient=±25ppm/°C, Tolerance=±0.1%, ComponentLink1Description=Datasheet, ComponentLink1URL=https://www.seielect.com/catalog/sei-rncs_rnch.pdf, ComponentLink2Description="DigiKey Link", ComponentLink2URL=https://www.digikey.com/en/products/detail/stackpole-electronics-inc/RNCS0603BKE10K0/1708836, Composition="Thin Film", Features="Anti-Corrosive, Automotive AEC-Q200, Moisture Resistant", Height - Seated (Max)="0.022\" (0.55mm)", LastUpdated="2/9/2024 8:43:37 PM", Lifecycle Status=Active, Minimum Order=1, Number of Terminations=2, Package / Case="0603 (1608 Metric)", Packaging=TapeAndReel, PartId=4838, Part Number=RNCS0603BKE10K0, Part Status=Active, Price=0.06, Series=RNCS, Size / Dimension="0.061\" L x 0.031\" W (1.55mm x 0.80mm)", Supplier 1=DigiKey
R2 R3 R7 R8 R9 R12 R13 R14 R15 R16 R17 R18 R19 R20 R21 R23: library part RNCS0603BKE10K0, "RES 10K OHM 0.1% 1/16W 0603", Device Package="0603 (1608 Metric)", Manufacturer="Stackpole Electronics Inc", Operating Temperature="-55°C ~ 155°C", Power (Watts)="0.063W, 1/16W", Ratings=AEC-Q200, Supplier Device Package=0603, Supplier Part Number 1=RNCS0603BKE10K0CT-ND, Temperature Coefficient=±25ppm/°C, Tolerance=±0.1%, ComponentLink1Description=Datasheet, ComponentLink1URL=https://www.seielect.com/catalog/sei-rncs_rnch.pdf, ComponentLink2Description="DigiKey Link", ComponentLink2URL=https://www.digikey.com/en/products/detail/stackpole-electronics-inc/RNCS0603BKE10K0/1708836, Composition="Thin Film", Features="Anti-Corrosive, Automotive AEC-Q200, Moisture Resistant", Height - Seated (Max)="0.022\" (0.55mm)", LastUpdated="2/9/2024 8:43:37 PM", Lifecycle Status=Active, Minimum Order=1, Number of Terminations=2, Package / Case="0603 (1608 Metric)", Packaging=TapeAndReel, PartId=4838, Part Number=RNCS0603BKE10K0, Part Status=Active, Price=0.06, Series=RNCS, Size / Dimension="0.061\" L x 0.031\" W (1.55mm x 0.80mm)", Supplier 1=DigiKey
  R2 R3 R8 R12 R14: Resistance="10 kOhms"
  R7 R9 R17 R18 R21 R23: Resistance="330 Ohms"
  R13 R15: Resistance="5.1k Ohms"
  R16: Resistance="100 Ohms"
  R19: Resistance="33k Ohms"
  R20: Resistance="1.5k Ohms"
R5: library part RNCS0603BKE10K0, "RES 4.7K OHM 0.1% 1/16W 0603", Device Package="0603 (1608 Metric)", Manufacturer="Stackpole Electronics Inc", Operating Temperature="-55°C ~ 155°C", Power (Watts)="0.063W, 1/16W", Ratings=AEC-Q200, Supplier Device Package=0603, Supplier Part Number 1=RNCS0603BKE10K0CT-ND, Temperature Coefficient=±25ppm/°C, Tolerance=±0.1%, ComponentLink1Description=Datasheet, ComponentLink1URL=https://www.seielect.com/catalog/sei-rncs_rnch.pdf, ComponentLink2Description="DigiKey Link", ComponentLink2URL=https://www.digikey.com/en/products/detail/stackpole-electronics-inc/RNCS0603BKE10K0/1708836, Composition="Thin Film", Features="Anti-Corrosive, Automotive AEC-Q200, Moisture Resistant", Height - Seated (Max)="0.022\" (0.55mm)", LastUpdated="2/9/2024 8:43:37 PM", Lifecycle Status=Active, Minimum Order=1, Number of Terminations=2, Package / Case="0603 (1608 Metric)", Packaging=TapeAndReel, PartId=4838, Part Number=RNCS0603BKE10K0, Part Status=Active, Price=0.06, Resistance="4.7k Ohms", Series=RNCS, Size / Dimension="0.061\" L x 0.031\" W (1.55mm x 0.80mm)", Supplier 1=DigiKey
R6: library part RNCS0603BKE10K0, "RES 4.7k OHM 0.1% 1/16W 0603", Device Package="0603 (1608 Metric)", Manufacturer="Stackpole Electronics Inc", Operating Temperature="-55°C ~ 155°C", Power (Watts)="0.063W, 1/16W", Ratings=AEC-Q200, Supplier Device Package=0603, Supplier Part Number 1=RNCS0603BKE10K0CT-ND, Temperature Coefficient=±25ppm/°C, Tolerance=±0.1%, ComponentLink1Description=Datasheet, ComponentLink1URL=https://www.seielect.com/catalog/sei-rncs_rnch.pdf, ComponentLink2Description="DigiKey Link", ComponentLink2URL=https://www.digikey.com/en/products/detail/stackpole-electronics-inc/RNCS0603BKE10K0/1708836, Composition="Thin Film", Features="Anti-Corrosive, Automotive AEC-Q200, Moisture Resistant", Height - Seated (Max)="0.022\" (0.55mm)", LastUpdated="2/9/2024 8:43:37 PM", Lifecycle Status=Active, Minimum Order=1, Number of Terminations=2, Package / Case="0603 (1608 Metric)", Packaging=TapeAndReel, PartId=4838, Part Number=RNCS0603BKE10K0, Part Status=Active, Price=0.06, Resistance="4.7k Ohms", Series=RNCS, Size / Dimension="0.061\" L x 0.031\" W (1.55mm x 0.80mm)", Supplier 1=DigiKey
R10: library part RNCS0603BKE10K0, "RES 100 OHM 0.1% 1/16W 0603", Device Package="0603 (1608 Metric)", Manufacturer="Stackpole Electronics Inc", Operating Temperature="-55°C ~ 155°C", Power (Watts)="0.063W, 1/16W", Ratings=AEC-Q200, Supplier Device Package=0603, Supplier Part Number 1=RNCS0603BKE10K0CT-ND, Temperature Coefficient=±25ppm/°C, Tolerance=±0.1%, ComponentLink1Description=Datasheet, ComponentLink1URL=https://www.seielect.com/catalog/sei-rncs_rnch.pdf, ComponentLink2Description="DigiKey Link", ComponentLink2URL=https://www.digikey.com/en/products/detail/stackpole-electronics-inc/RNCS0603BKE10K0/1708836, Composition="Thin Film", Features="Anti-Corrosive, Automotive AEC-Q200, Moisture Resistant", Height - Seated (Max)="0.022\" (0.55mm)", LastUpdated="2/9/2024 8:43:37 PM", Lifecycle Status=Active, Minimum Order=1, Number of Terminations=2, Package / Case="0603 (1608 Metric)", Packaging=TapeAndReel, PartId=4838, Part Number=RNCS0603BKE10K0, Part Status=Active, Price=0.06, Resistance="100 Ohms", Series=RNCS, Size / Dimension="0.061\" L x 0.031\" W (1.55mm x 0.80mm)", Supplier 1=DigiKey
R11 R22: library part TLRZ1JTTD, "RES 0 OHM JUMPER 0603", Device Package="0603 (1608 Metric)", Manufacturer="KOA Speer Electronics, Inc.", Operating Temperature="-55°C ~ 170°C", Ratings=AEC-Q200, Supplier Device Package=0603, Supplier Part Number 1=2019-TLRZ1JTTDCT-ND, Tolerance=Jumper, ComponentLink1Description=Datasheet, ComponentLink1URL=http://www.koaspeer.com/catimages/Products/TLRZ/TLRZ.pdf, ComponentLink2Description="DigiKey Link", ComponentLink2URL=https://www.digikey.com/en/products/detail/koa-speer-electronics-inc/TLRZ1JTTD/9845493, Composition="Metal Element", Features="Automotive AEC-Q200, Current Sense", Height - Seated (Max)="0.022\" (0.55mm)", LastUpdated="2/9/2024 8:43:37 PM", Lifecycle Status=Active, Minimum Order=1, Number of Terminations=2, Package / Case="0603 (1608 Metric)", Packaging=TapeAndReel, PartId=4851, Part Number=TLRZ1JTTD, Part Status=Active, Price=0.08, Resistance="0 Ohms", Series=TLRZ, Size / Dimension="0.063\" L x 0.031\" W (1.60mm x 0.80mm)", Supplier 1=DigiKey
STM1: "128KB 2V~3.6V ARM-M3 20KB 72MHz FLASH 37 LQFP-48(7x7) Microcontrollers (MCU/MPU/SOC) ROHS", JLCPCB Part #=C8304, Package=LQFP-48, ComponentLink1Description=Datasheet, ComponentLink1URL=https://www.st.com/resource/en/datasheet/cd00161566.pdf, ComponentLink2Description="JLCPCB Parts", ComponentLink2URL=https://jlcpcb.com/partdetail/Stmicroelectronics-STM32F103CBT6/C8304, MFR.Part #=STM32F103CBT6
UESD1: library part USBLC6-2, "The USBLC6-2SC6 and USBLC6-2P6 are / monolithic application specific devices dedicated / to ESD protection of high speed interfaces, such / as USB 2.0, Ethernet links and video lines. / The very low line capacitance secures a high level / of signal integrity without compromising in / protecting sensitive chips against the most / stringently characterized ESD strikes.", JLCPCB Part #=C7519, ComponentLink1Description=JLCPCB, ComponentLink1URL=https://jlcpcb.com/partdetail/Stmicroelectronics-USBLC62SC6/C7519, ComponentLink2Description=Datasheet, ComponentLink2URL=https://www.st.com/resource/en/datasheet/usblc6-2.pdf
USB*1: library part "USB TYPE-C 24P SMD", Current Rating="5 Amp", LCSC Part=C2765186, Voltage Rating="3.3V - 48V", ComponentLink1Description=lcsc, ComponentLink1URL=https://www.lcsc.com/product-detail/USB-Connectors_SHOU-HAN-TYPE-C-16PIN-2MD-073_C2765186.html, ComponentLink2Description="datasheet 1", ComponentLink2URL=https://www.lcsc.com/datasheet/lcsc_datasheet_2111231930_SHOU-HAN-TYPE-C-16PIN-2MD-073_C2765186.pdf, ComponentLink3Description="datasheet 2", ComponentLink3URL=https://www.digikey.com/en/products/detail/gct/USB4105-GF-A/11198441, ComponentLink4Description=aliexpress, ComponentLink4URL=https://www.aliexpress.com/item/1005006353547160.html?spm=a2g0o.order_list.order_list_main.61.296f18023vUA5z, Gender=Female, Pin Number=16, Stock=~30, USB Type="TYPE-C 16PIN / 24PIN"
Y1: library part "TSX-3225 16.0000MF10U-B0", ESR (Equivalent Series Resistance)="60 Ohms", Frequency Stability=±10ppm, Load Capacitance=16pF, Manufacturer=EPSON, Operating Mode=Fundamental, Operating Temperature="-10°C ~ 60°C", Package / Case="4-SMD, No Lead", Supplier Part Number 1=SER4370CT-ND, ComponentLink1Description=Datasheet, ComponentLink1URL=https://support.epson.biz/td/api/doc_check.php?dl=brief_TSX-3225&lang=en, ComponentLink2Description="DigiKey Link", ComponentLink2URL=https://www.digikey.com/en/products/detail/epson/TSX-3225-16-0000MF10U-B0/5260851, Frequency="8 MHz", Frequency Tolerance=±10ppm, Height - Seated (Max)="0.024\" (0.60mm)", LastUpdated="6/3/2024 8:02:15 PM", Lifecycle Status=Active, Minimum Order=1, Mounting Type="Surface Mount", Packaging=TapeAndReel, PartId=436, Part Number="TSX-3225 16.0000MF10U-B0", Part Status=Active, Price=0.20, Series=TSX-3225, Size / Dimension="0.126\" L x 0.098\" W (3.20mm x 2.50mm)", Supplier 1=DigiKey, Type="MHz Crystal"
Y2: library part "TSX-3225 16.0000MF10U-B0", "CRYSTAL 16.0000MHZ 16PF SMD", ESR (Equivalent Series Resistance)="60 Ohms", Frequency="16 MHz", Frequency Stability=±10ppm, Load Capacitance=16pF, Manufacturer=EPSON, Operating Mode=Fundamental, Operating Temperature="-10°C ~ 60°C", Package / Case="4-SMD, No Lead", Supplier Part Number 1=SER4370CT-ND, ComponentLink1Description=Datasheet, ComponentLink1URL=https://support.epson.biz/td/api/doc_check.php?dl=brief_TSX-3225&lang=en, ComponentLink2Description="DigiKey Link", ComponentLink2URL=https://www.digikey.com/en/products/detail/epson/TSX-3225-16-0000MF10U-B0/5260851, Frequency Tolerance=±10ppm, Height - Seated (Max)="0.024\" (0.60mm)", LastUpdated="6/3/2024 8:02:15 PM", Lifecycle Status=Active, Minimum Order=1, Mounting Type="Surface Mount", Packaging=TapeAndReel, PartId=436, Part Number="TSX-3225 16.0000MF10U-B0", Part Status=Active, Price=0.20, Series=TSX-3225, Size / Dimension="0.126\" L x 0.098\" W (3.20mm x 2.50mm)", Supplier 1=DigiKey, Type="MHz Crystal"

## Via types
v1: diameter 0.5, hole 0.3, Top Layer to Bottom Layer, 168 vias

## Nets (pads, with @x,y where several pads share a name; then routed paths per layer and width w, separated by ;. In a path a pad name is that pad's centre, name@x,y a point inside that pad or via, vN(x,y) a via of type N, cw(c..) or ccw(c..) an arc to the next point about the centre after c; other vN are vias at no path point)
+3V3: C8.2 C9.2 C10.2 C11.2 C12.2 C14.2 C15.2 C16.2 C17.2 C18.2 C19.2 C20.2 D5.1 HB1.1 HT1.2 HT1.3 IC1.2 IC1.4 PP2.1 Q1.3 R1.1 R5.2 R8.1 R17.1 R22.1 STM1.1 STM1.9 STM1.24 STM1.36 STM1.48 STM2.1 STM2.9 STM2.24 STM2.36 STM2.48 | length 45.7
  Top Layer w0.15: v1(104.394,73.185) 104.394,73.152 C15.2@105.06,72.486 ; R8.1@105.021,69.898 104.985,69.863 104.985,69.012 104.775,68.802 v1(104.775,68.707) 105.259,68.223 105.789,68.223 C8.2@105.822,68.256 ; v1(105.656,75.105) 106.308,74.453 C12.2@106.33,74.453 ; C12.2@106.457,74.072 106.802,74.417 107.217,74.417 107.266,74.466 107.916,74.466 STM2.9@108.49,73.893 ; v1(107.823,67.577) 108.554,68.309 C16.2@108.554,68.357 ; v1(110.871,77.47) 110.938,77.403 110.938,77.101 STM2.1@111.318,76.721 STM2.1@111.318,76.726 ; STM2.24@111.318,68.059 111.318,68.027 110.982,67.691 110.982,67.343 111.318,67.008 111.318,66.825 110.967,66.474 C9.2@110.967,65.944 111.505,66.481 111.693,66.481 v1(111.76,66.548) ; STM2.48@112.202,76.721 112.215,76.721 113.315,77.82 C10.2@113.315,77.947 113.315,78.351 113.725,78.761 113.725,78.927 v1(113.792,78.994) ; STM2.36@116.091,71.948 116.151,71.948 116.466,71.633 C11.2@117.663,71.633 ; v1(117.348,72.517) 117.348,72.478 117.663,72.163 C11.2@117.663,71.633 ; C11.2@117.698,71.597 C11.2@117.663,71.633 ; v1(118.364,74.168) 118.398,74.168 118.845,74.615 119.375,74.615 C20.2@119.411,74.58 119.651,74.58 STM1.48@120.816,73.415 ; v1(119.766,70.47) 119.843,70.47 120.738,71.365 STM1.1@120.816,71.365 ; R22.1@120.381,79.629 120.396,79.644 v1(120.396,80.645) ; v1(123.317,66.294) C18.2@122.524,67.087 122.524,67.417 STM1.9@123.644,68.536 ; STM1.36@126.755,77.304 127.63,78.179 C17.2@127.63,79.182 ; C17.2@127.666,79.217 C17.2@127.63,79.182 ; v1(128.523,80.01) 127.695,79.182 C17.2@127.63,79.182 ; R5.2@128.603,67.008 128.638,66.972 129.465,66.972 v1(129.937,66.5) ; STM1.24@130.644,71.365 131.668,70.341 C19.2@131.668,69.914 131.717,69.914 v1(132.461,70.658)
  Top Layer w0.5: v1(128.778,65.278) 129.865,65.278 C14.2@129.937,65.351 ; v1(129.937,66.5) C14.2@129.937,65.351 ; C14.2@130.01,65.278 C14.2@129.937,65.351 ; v1(132.08,79.248) D5.1@133.316,79.248 ; R1.1@135.89,74.28 135.89,72.111 IC1.4@136.271,71.73 ; v1(141.728,70.534) 141.728,71.386 Q1.3@141.732,71.39 ; R17.1@148.082,78.344 148.257,78.169 149.034,78.169 v1(149.479,77.724)
  Bottom Layer w0.15: PP2.1@142.24,66.04 142.24,67.1 142.494,67.354 v1(142.494,67.829)
  other v1: 135.89,66.436 136.652,66.436 135.89,67.225 136.652,67.225 135.89,69.827 136.652,69.827 135.001,69.85 137.526,69.85 134.366,70.643 138.395,70.739 134.366,71.39 138.395,71.501 134.366,72.14 138.395,72.257
+5: C13.2 C22.1 FB1.1 HT1.1 IC1.3 R14.2 | length 34.8
  Top Layer w0.5: IC1.3@138.571,65.43 138.571,65.68 139.774,66.883 141.013,66.883 C13.2@141.224,67.094 ; v1(141.196,68.301) 141.196,67.122 C13.2@141.224,67.094 ; R14.2@144.526,70.47 144.476,70.47 143.797,69.791 143.797,69.034 FB1.1@143.597,68.834 143.554,68.79 143.554,67.012 C22.1@143.51,66.969 143.448,67.031 141.286,67.031 C13.2@141.224,67.094 ; v1(150.241,72.136) 150.241,73.214 153.13,76.104 153.13,80.621 152.4,81.351 HT1.1@152.4,83.82
  Bottom Layer w0.5: v1(141.196,68.301) 142.117,68.301 144.035,70.218 148.323,70.218 v1(150.241,72.136)
CLK: PP2.3 STM1.37 | length 35.9
  Top Layer w0.15: STM1.37@124.705,77.304 125.086,76.923 125.192,76.923 v1(125.613,77.343) ; v1(139.319,70.93) 139.319,70.993 140.715,72.389 141.986,72.389 142.367,72.008 v1(142.367,70.602)
  Layer 2 w0.15: v1(125.613,77.343) 125.613,74.412 v1(126.873,73.152) ; v1(132.334,72.771) 132.385,72.771 132.675,73.06 138.811,73.06 139.032,72.84 139.032,71.312 139.319,71.024 v1(139.319,70.93) ; v1(142.367,70.602) 142.367,68.635 v1(146.359,64.643)
  Bottom Layer w0.15: v1(126.873,73.152) 127,73.152 128.27,71.882 129.894,71.882 130.783,72.771 v1(132.334,72.771) ; v1(146.359,64.643) 147.32,65.604 PP2.3@147.32,66.04
DF_N: STM1.32 UESD1.4 | length 17
  Top Layer w0.15: STM1.32@128.17,75.89 128.558,76.279 128.558,76.456 130.081,77.978 140.847,77.978 141.041,77.784 141.041,76.643 141.354,76.329 141.582,76.329 141.67,76.241 141.67,75.979 142.145,75.504 UESD1.4@142.345,75.504
DF_P: R20.1 STM1.33 UESD1.6 | length 19.6
  Top Layer w0.15: STM1.33@127.816,76.244 128.205,76.633 128.382,76.633 129.977,78.228 140.951,78.228 141.291,77.888 141.291,76.746 141.458,76.579 141.582,76.579 141.67,76.667 141.67,76.929 UESD1.6@142.145,77.404 ; R20.1@141.336,79.502 141.336,78.802 141.92,78.218 141.92,77.629 UESD1.6@142.145,77.404 ; UESD1.6@142.345,77.404 UESD1.6@142.145,77.404
DIO: PP2.2 STM1.34 | length 28
  Top Layer w0.15: v1(126.111,76.244) 126.139,76.244 126.461,75.922 126.746,75.922 127.421,76.597 STM1.34@127.462,76.597
  Layer 2 w0.15: v1(126.111,76.244) 126.111,74.906 v1(127.762,73.255) ; v1(143.002,70.793) 143.002,69.226 v1(144.399,67.829)
  Bottom Layer w0.15: v1(127.762,73.255) 127.767,73.26 127.892,73.26 128.762,72.39 130.048,72.39 131.06,73.402 140.393,73.402 v1(143.002,70.793) ; v1(144.399,67.829) 144.399,66.913 144.78,66.532 PP2.2@144.78,66.04